# Altium PCB LEDA_Arcade Controller Mainboard (No Speaker).pcbdoc (part 1 of 2)
Units mil, origin at the board's own origin, x right, y up, seen from the top; angles counter-clockwise.
Board outline 4160.66 x 4159.61 mil, 2 copper layers (Top Layer, Bottom Layer); 47 components, 129 nets, 313 pads, 144 vias.
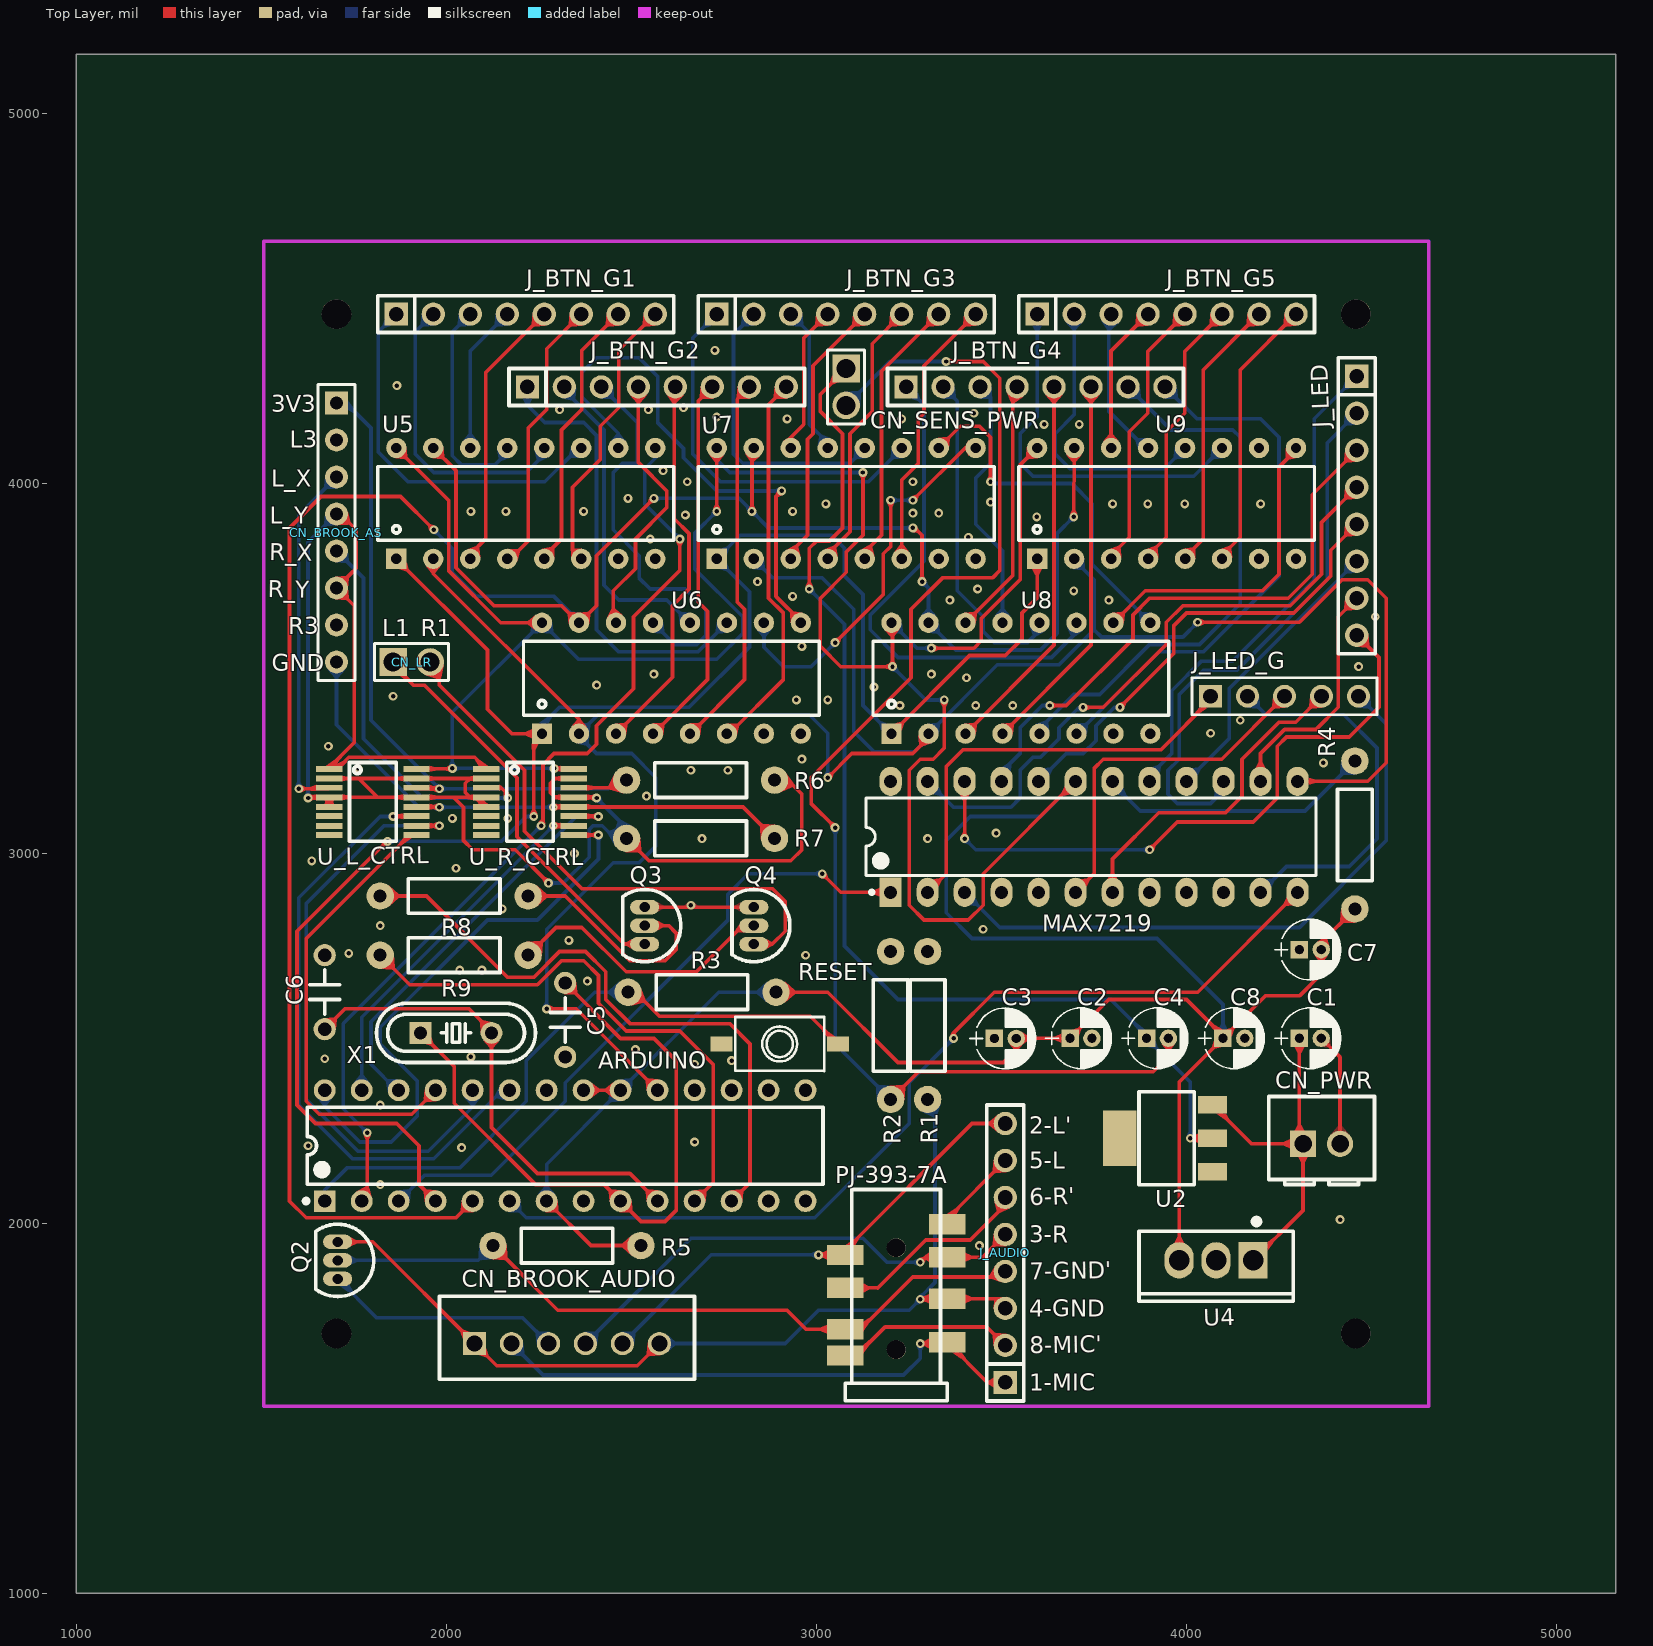
[diagram p0: Top Layer view]
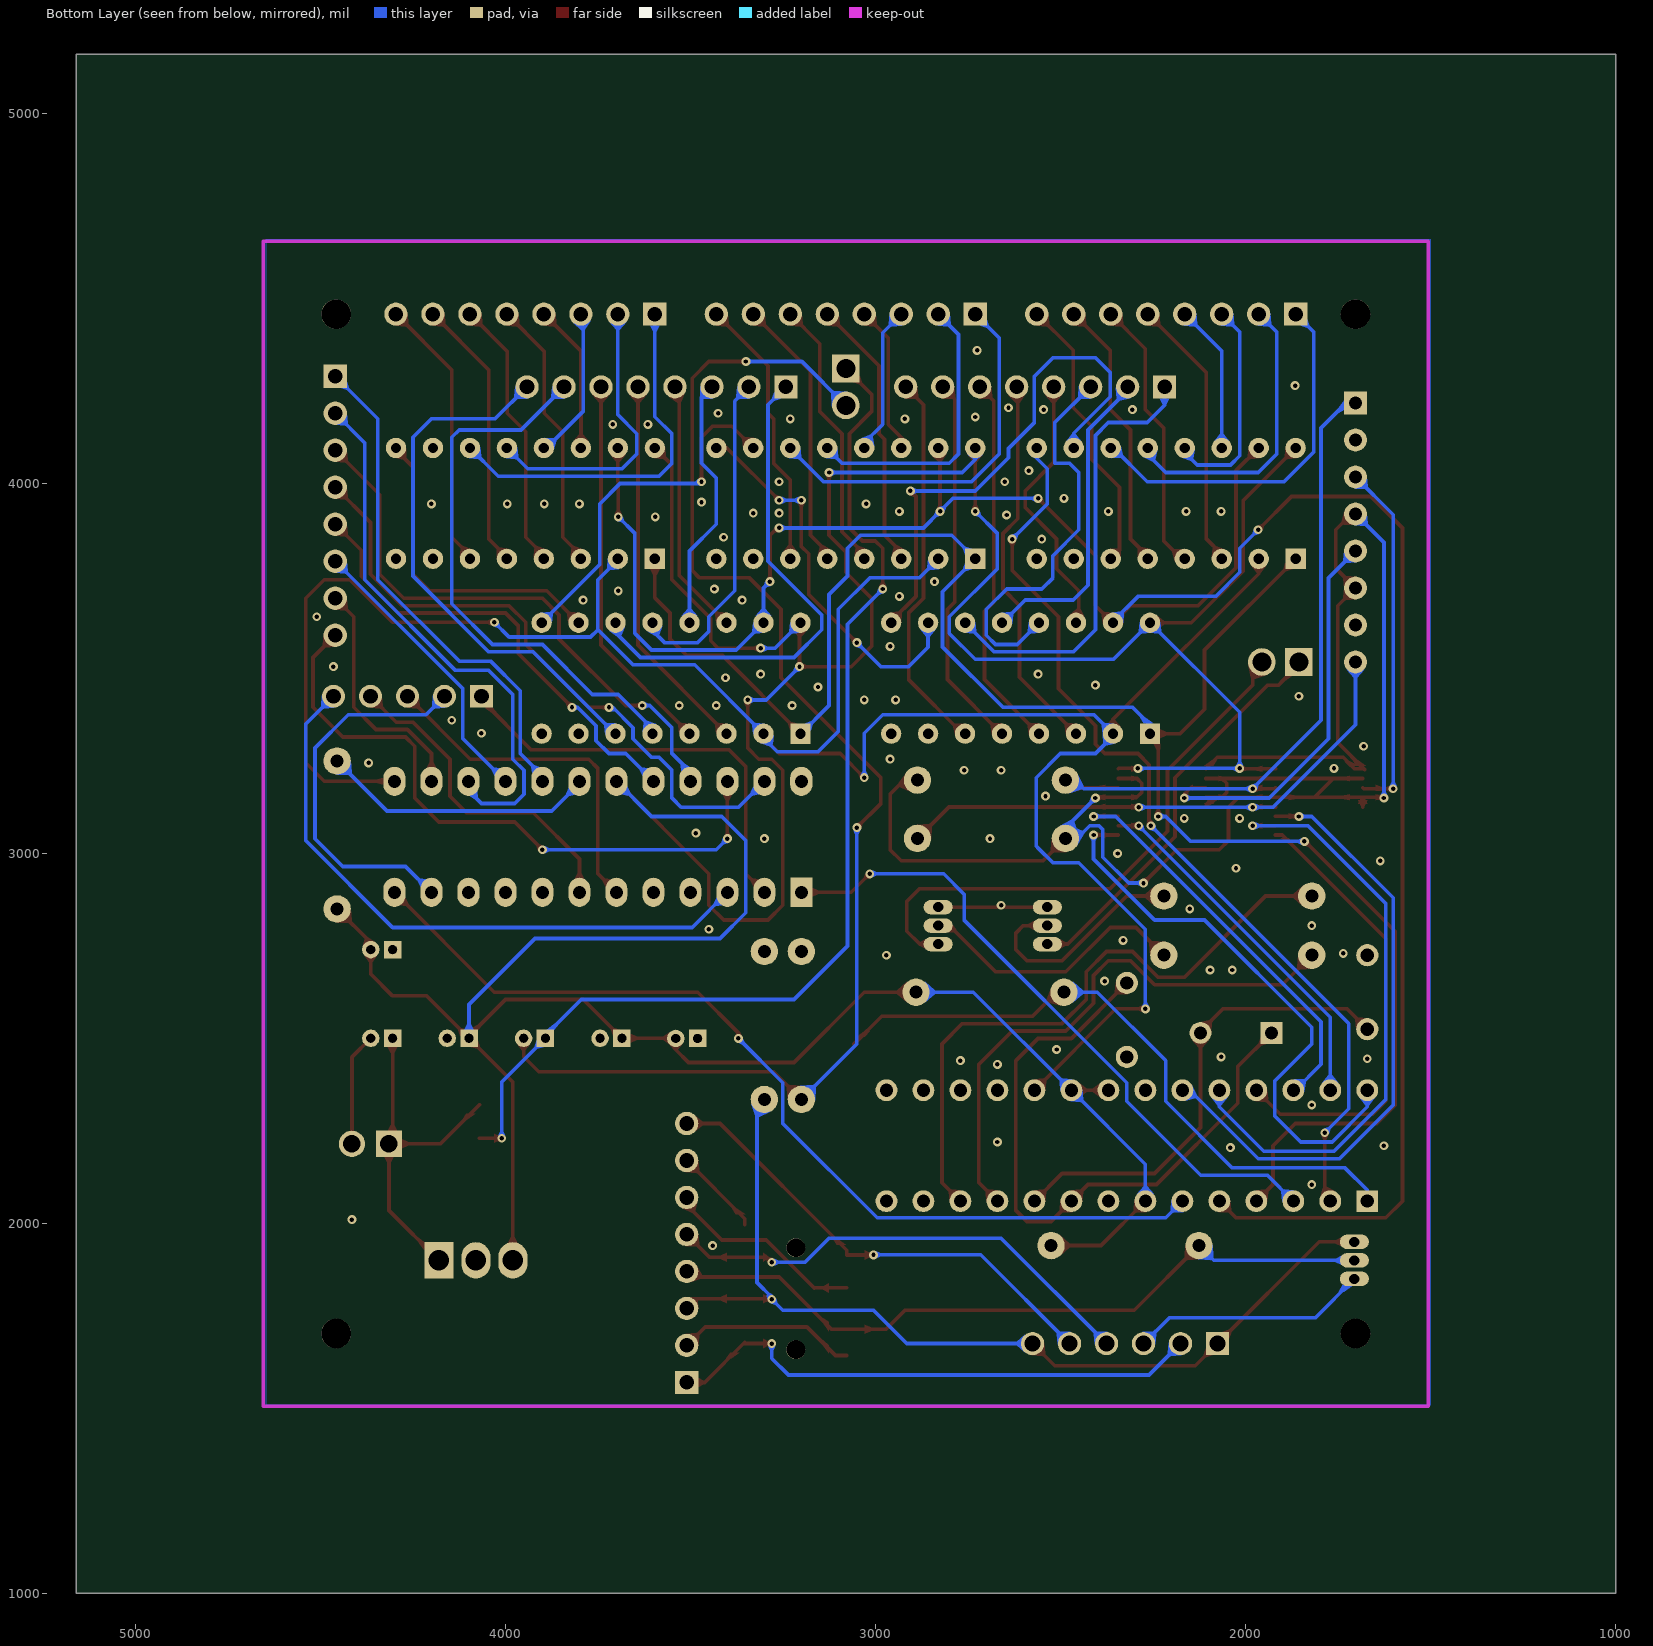
[diagram p1: Bottom Layer view, seen from below]

## Layer stack, top to bottom
Top Layer: signal copper (thickness not stored)
Dielectric: dielectric 12.6, FR-4, Dk 4.8
Bottom Layer: signal copper (thickness not stored)

## Board outline
5160.66,1000 1000,1000 1000,5159.61 5160.66,5159.61

## Components (designator, comment, footprint, x,y, rotation, side; value= is the part's Value field where it differs from the comment)
ARDUINO "ATMEGA328P-PU" DIP-28_300MIL 2321.05,2209.61 r180 top
C1 "10u" CP_RADIAL_D4.0MM_P1.50MM 4335.58,2500.01 r0 top
C2 "10u" CP_RADIAL_D4.0MM_P1.50MM 3715.58,2500.01 r0 top
C3 "0.1u" CP_RADIAL_D4.0MM_P1.50MM 3511.05,2499.61 r0 top
C4 "10u" CP_RADIAL_D4.0MM_P1.50MM 3922.28,2500.01 r0 top
C5 "22p" CAP-0.2 2321.05,2549.61 r90 top
C6 "22p" CAP-0.2 1671.05,2624.61 r270 top
C7 "0.1u" CP_RADIAL_D4.0MM_P1.50MM 4335.58,2739.61 r0 top
C8 "10u" CP_RADIAL_D4.0MM_P1.50MM 4128.88,2500.01 r0 top
CN_BROOK_AS "Header2.54mm 1*8P" HDR-8X1/2.54 1702.9,3867.2 r270 top
CN_BROOK_AUDIO "2501SB-6P" 2501SB-6P 2326.05,1674.61 r0 top
CN_LR "2.54mm 1*2P" HDR-2X1/2.54 1906.05,3517.2 r90 top
CN_PWR "2501S-2P" 2501S-2P 4366.05,2214.61 r0 top
CN_SENS_PWR "2.54mm 1*2P" HDR-2X1/2.54 3080.86,4260.9 r0 top
J_AUDIO "Header2.54mm 1*8P" HDR-TH_8PIN-V-MALE-PITCH2.54 3511.05,1919.61 r90 top
J_BTN_G1 "Header2.54mm 1*8P" HDR-TH_8PIN-V-MALE-PITCH2.54 2214.71,4457.76 r0 top
J_BTN_G2 "Header2.54mm 1*8P" HDR-TH_8PIN-V-MALE-PITCH2.54 2569.05,4260.9 r0 top
J_BTN_G3 "Header2.54mm 1*8P" HDR-TH_8PIN-V-MALE-PITCH2.54 3080.86,4457.76 r0 top
J_BTN_G4 "Header2.54mm 1*8P" HDR-TH_8PIN-V-MALE-PITCH2.54 3592.67,4260.9 r0 top
J_BTN_G5 "Header2.54mm 1*8P" HDR-TH_8PIN-V-MALE-PITCH2.54 3947,4457.76 r0 top
J_LED "Header2.54mm 1*8P" HDR-TH_8PIN-V-MALE-PITCH2.54 4461.05,3939.61 r270 top
J_LED_G "2.54mm 1*5P Header" HDR-5X1/2.54 4266.05,3424.61 r0 top
MAX7219 "max7219cng" DIP-24_300MIL 3751.05,3044.61 r180 top
PJ-393-7A "PJ-393-7A" PJ-393-7A 3216.06,1819.64 r180 top
Q2 "2N2222" TO-92(TO-92-3) 1706.05,1899.61 r0 top
Q3 "2N2222" TO-92(TO-92-3) 2536.05,2804.61 r0 top
Q4 "2N2222" TO-92(TO-92-3) 2831.05,2804.61 r0 top
R1 "0" AXIAL-0.4 3301.05,2534.61 r90 top
R2 "0" AXIAL-0.4 3201.05,2534.61 r90 top
R3 "10k" AXIAL-0.4 2691.05,2624.61 r0 top
R4 "53.6k" AXIAL-0.4 4456.05,3049.61 r90 top
R5 "100KΩ" AXIAL-0.4 2326.05,1939.61 r0 top
R6 "5.1K" AXIAL-0.4 2687.15,3197.91 r180 top
R7 "5.1K" AXIAL-0.4 2687.15,3040.41 r180 top
R8 "100KΩ" AXIAL-0.4 2021.05,2884.61 r180 top
R9 "100KΩ" AXIAL-0.4 2021.05,2724.61 r180 top
RESET "K2-1107ST-A4SW-06" K2-1107ST-A4SW-06 2901.05,2484.61 r0 top
U2 "AMS1117-5.0" SOT-223 3946.05,2229.61 r180 top
U4 "L7805CV" TO-220(TO-220-3) 4081.05,1899.61 r270 top
U5 "74HC165N" DIP16 2214.71,3945.95 r0 top
U6 "74HC165N" DIP16 2608.42,3473.5 r0 top
U7 "74HC165N" DIP16 3080.86,3945.95 r0 top
U8 "74HC165N" DIP16 3553.3,3473.5 r0 top
U9 "74HC165N" DIP16 3947,3945.95 r0 top
U_L_CTRL "74HC4051PW-Q100,11" TSSOP-16 1801.33,3138.86 r0 top
U_R_CTRL "74HC4051PW-Q100,11" TSSOP-16 2226.05,3138.86 r0 top
X1 "16MHZ" HC-49S 2026.05,2514.61 r0 top

## Footprints (in the part's own frame and the unit in brackets; to place one, negate y for a bottom-side part, rotate by r counter-clockwise, add the part's x,y. Pads: shape width x height; smd on the part's side, far side on the other; paste and mask are expansions set on the pad)
2501S-2P [mm]
  rect 1.8x1.8 hole 1.2: 1(-1.27,0)
  round 1.8 hole 1.2: 2(1.27,0)
  silkscreen extent -3.63,-2.79 3.63,3.25
2501SB-6P [mm]
  rect 1.6x1.6 hole 1.1: 1(-6.35,0)
  round 1.6 hole 1.1: 2(-3.81,0) 3(-1.27,0) 4(1.27,0) 5(3.81,0) 6(6.35,0)
  silkscreen extent -8.75,-2.45 8.75,3.25
AXIAL-0.4 [mil]
  round 74 hole 35.4: 1(-200,0) 2(200,0)
  silkscreen extent -124,-47 124,47
CAP-0.2 [mil]
  round 60 hole 36: 1(-100,0) 2(100,0)
  silkscreen extent -60,-40 60,40
CP_RADIAL_D4.0MM_P1.50MM [mm]
  rect 1.2x1.2 hole 0.6 slot 0.605 at 0 deg: 1(-0.75,0)
  round 1.2 hole 0.6 slot 0.605 at 0 deg: 2(0.75,0)
  silkscreen extent -2.45,-2.09 2.09,2.09
DIP16 [mil]
  rect 55x55 hole 28: 1(-350,-150)
  round 55 hole 28: 2(-250,-150) 3(-150,-150) 4(-50,-150) 5(50,-150) 6(150,-150) 7(250,-150) 8(350,-150) 9(350,150) 10(250,150) 11(150,150) 12(50,150) 13(-50,150) 14(-150,150) 15(-250,150) 16(-350,150)
  silkscreen extent -400,-100 400,100
DIP-24_300MIL [mm]
  rect 1.5x2 hole 0.9: 1(13.97,3.81)
  oval 1.5x2 hole 0.9: 2(11.43,3.81) 3(8.89,3.81) 4(6.35,3.81) 5(3.81,3.81) 6(1.27,3.81) 7(-1.27,3.81) 8(-3.81,3.81) 9(-6.35,3.81) 11(-11.43,3.81)
  oval 1.524x2 hole 0.9: 10(-8.89,3.81) 12(-13.97,3.81) 13(-13.97,-3.81) 14(-11.43,-3.81) 15(-8.89,-3.81) 16(-6.35,-3.81) 17(-3.81,-3.81) 18(-1.27,-3.81) 19(1.27,-3.81) 20(3.81,-3.81) 21(6.35,-3.81) 22(8.89,-3.81) 23(11.43,-3.81) 24(13.97,-3.81)
  silkscreen extent -15.24,-2.67 15.66,3.93
DIP-28_300MIL [mm]
  rect 1.5x1.5 hole 0.9: 1(16.51,3.81)
  round 1.5 hole 0.9: 2(13.97,3.81) 3(11.43,3.81) 4(8.89,3.81) 5(6.35,3.81) 6(3.81,3.81) 7(1.27,3.81) 8(-1.27,3.81) 9(-3.81,3.81) 10(-6.35,3.81) 11(-8.89,3.81) 12(-11.43,3.81) 13(-13.97,3.81) 14(-16.51,3.81) 15(-16.51,-3.81) 16(-13.97,-3.81) 17(-11.43,-3.81) 18(-8.89,-3.81) 19(-6.35,-3.81) 20(-3.81,-3.81) 21(-1.27,-3.81) 22(1.27,-3.81) 23(3.81,-3.81) 24(6.35,-3.81) 25(8.89,-3.81) 26(11.43,-3.81) 27(13.97,-3.81) 28(16.51,-3.81)
  silkscreen extent -17.7,-2.65 17.94,3.95
HC-49S [mm]
  rect 1.5x1.5 hole 0.9: 1(-2.438,0)
  round 1.5 hole 0.9: 2(2.438,0)
  silkscreen extent -5.46,-2.03 5.46,2.03
HDR-2X1/2.54 [mm]
  rect 1.9x1.9 hole 1.3: 1(0,1.27)
  round 1.9 hole 1.3: 2(0,-1.27)
  silkscreen extent -1.27,-2.54 1.27,2.54
HDR-5X1/2.54 [mil]
  rect 62x62 hole 40.16: 1(-200,0)
  round 62 hole 40.16: 2(-100,0) 3(0,0) 4(100,0) 5(200,0)
  silkscreen extent -250,-50 250,50
HDR-8X1/2.54 [mil]
  rect 62x62 hole 35: 1(-350,0)
  round 62 hole 35: 2(-250,0) 3(-150,0) 4(-50,0) 5(50,0) 6(150,0) 7(250,0) 8(350,0)
  silkscreen extent -400,-50 400,50
HDR-TH_8PIN-V-MALE-PITCH2.54 [mm]
  rect 1.6x1.6 hole 1: 1(-8.89,0)
  round 1.6 hole 1: 2(-6.35,0) 3(-3.81,0) 4(-1.27,0) 5(1.27,0) 6(3.81,0) 7(6.35,0) 8(8.89,0)
  silkscreen extent -10.16,-1.27 10.16,1.27
K2-1107ST-A4SW-06 [mm]
  rect 1.5x1 smd: 1(-4,0) 2(4,0)
  silkscreen extent -3.05,-1.85 3.05,1.85
PJ-393-7A [mm]
  rect 2.5x1.4 smd: 1(-3.5,3.6) 2(3.5,-2.4) 3(-3.5,-2.25) 4(-3.5,0.6) 5(-3.5,-4.5) 6(3.5,-0.15) 7(3.5,2.7) 8(3.5,4.5)
  round 1.3 hole 1.3 unplated: ""(0,4.099) ""(0,-2.899)
  silkscreen extent -3.5,-6.9 3.5,7.6
SOT-223 [mm]
  rect 2x1.2 smd: 1(-3.175,2.3) 2(-3.175,0) 3(-3.175,-2.3)
  rect 2.3x3.8 smd: 4(3.175,0)
  silkscreen extent -1.93,-3.2 1.87,3.2
TO-92(TO-92-3) [mm]
  oval 2x1 hole 0.7: 1(0,1.27) 2(0,0) 3(0,-1.27)
  silkscreen extent -1.5,-2.48 2.48,2.48
TO-220(TO-220-3) [mm]
  rect 2.5x2 hole 1.4: 1(0,2.54)
  oval 2.5x2 hole 1.4: 2(0,0) 3(0,-2.54)
  silkscreen extent -2.86,-5.3 2.8,5.3
TSSOP-16 [mil]
  rect 71x16 smd: 1(-118.11,89.5) 2(-118.11,63.5) 3(-118.11,38.5) 4(-118.11,12.5) 5(-118.11,-13.5) 6(-118.11,-38.5) 7(-118.11,-64.5) 8(-118.11,-89.5) 9(118.11,-89.5) 10(118.11,-64.5) 11(118.11,-38.5) 12(118.11,-13.5) 13(118.11,12.5) 14(118.11,38.5) 15(118.11,63.5) 16(118.11,89.5)
  silkscreen extent -63,-106 63,106

## Free pads (board coordinates)
  round 80 hole 80 unplated: ""(1702.9,1701.85) ""(1702.9,4457.76) ""(4458.81,1701.85) ""(4458.81,4457.76)

## Via types
v1: diameter 24, hole 12, Top Layer to Bottom Layer, 144 vias

## Nets (pads, with @x,y where several pads share a name; then routed paths per layer and width w, separated by ;. In a path a pad name is that pad's centre, name@x,y a point inside that pad or via, vN(x,y) a via of type N, cw(c..) or ccw(c..) an arc to the next point about the centre after c; other vN are vias at no path point)
AGND: CN_BROOK_AUDIO.1 CN_BROOK_AUDIO.6 J_AUDIO.3 PJ-393-7A.4 Q2.1 R1.1 | length 2594.7
  Top Layer w10: Q2.1@1706.05,1949.61 1801.04,1949.61 CN_BROOK_AUDIO.1@2076.05,1674.6 2136.04,1614.61 2511.05,1614.61 2516.06,1614.61 CN_BROOK_AUDIO.6@2576.05,1674.6 ; v1(3281.05,1794.61) 3282.47,1796.03 PJ-393-7A.4@3353.86,1796.03 3484.63,1796.03 J_AUDIO.3@3511.05,1769.61
  Bottom Layer w10: CN_BROOK_AUDIO.6@2576.05,1674.6 2916.04,1674.6 3006.05,1764.61 3251.05,1764.61 v1(3281.05,1794.61) 3281.05,1799.61 3321.05,1839.61 3321.05,2314.61 R1.1@3301.05,2334.61
AJ_DETECT: CN_BROOK_AUDIO.3 Q2.3 | length 642.5
  Bottom Layer w10: Q2.3@1706.05,1849.61 1811.05,1744.61 2066.05,1744.61 2206.05,1744.61 CN_BROOK_AUDIO.3@2276.05,1674.61
AJ_L: CN_BROOK_AUDIO.5 J_AUDIO.8 PJ-393-7A.2 | length 1289.3
  Top Layer w10: v1(3006.05,1914.61) 3006.52,1914.14 PJ-393-7A.2@3078.26,1914.14 3078.26,1926.82 3421.05,2269.61 J_AUDIO.8@3511.05,2269.61
  Bottom Layer w10: CN_BROOK_AUDIO.5@2476.05,1674.6 2716.06,1914.61 v1(3006.05,1914.61)
AJ_L': J_AUDIO.7 PJ-393-7A.5 | length 237.9
  Top Layer w10: PJ-393-7A.5@3353.86,1996.81 3353.85,2012.41 J_AUDIO.7@3511.05,2169.61
AJ_MIC: CN_BROOK_AUDIO.2 J_AUDIO.1 PJ-393-7A.1 | length 1477
  Top Layer w10: v1(3281.05,1674.61) 3353.85,1674.61 PJ-393-7A.1@3353.86,1677.92 3462.16,1569.61 J_AUDIO.1@3511.05,1569.61
  Bottom Layer w10: CN_BROOK_AUDIO.2@2176.05,1674.61 2261.05,1589.61 3236.05,1589.61 3281.05,1634.61 v1(3281.05,1674.61)
AJ_MIC': J_AUDIO.2 PJ-393-7A.8 | length 485.4
  Top Layer w10: PJ-393-7A.8@3078.26,1642.48 3108.92,1642.48 3186.05,1719.61 3461.05,1719.61 J_AUDIO.2@3511.05,1669.61
AJ_R: CN_BROOK_AUDIO.4 J_AUDIO.5 PJ-393-7A.3 | length 1311
  Top Layer w10: v1(3281.05,1894.61) 3294.67,1908.23 PJ-393-7A.3@3353.86,1908.23 3449.67,1908.23 J_AUDIO.5@3511.05,1969.61
  Bottom Layer w10: CN_BROOK_AUDIO.4@2376.05,1674.6 2661.05,1959.61 3126.05,1959.61 3191.05,1894.61 v1(3281.05,1894.61)
AJ_R': J_AUDIO.6 PJ-393-7A.6 | length 546
  Top Layer w10: PJ-393-7A.6@3078.26,1825.55 3166.15,1824.71 3296.05,1954.61 3416.05,1954.61 3511.05,2049.61 J_AUDIO.6@3511.05,2069.61
ARDUINO_1: ARDUINO.1 R3.1 RESET.2 | length 1761.5
  Top Layer w10: R3.1@2491.05,2624.61 2511.05,2624.61 2576.05,2559.61 2983.53,2559.61 RESET.2@3058.53,2484.61
  Bottom Layer w10: ARDUINO.1@1671.05,2059.61 1671.05,2089.61 1731.05,2149.61 2036.05,2149.61 2216.05,2329.61 2216.05,2439.61 2401.05,2624.61 R3.1@2491.05,2624.61
ARDUINO_9: ARDUINO.9 C5.2 X1.1 | length 1764.7
  Top Layer w10: X1.1@1930.05,2514.61 2021.05,2423.61 2021.05,2384.61 2021.05,2324.61 2241.05,2104.61 2426.05,2104.61 ARDUINO.9@2471.05,2059.61 2526.05,2004.61 2591.05,2004.61 2621.05,2034.61 2621.05,2439.61 2561.05,2499.61 2471.05,2499.61 C5.2@2321.05,2649.61
ARDUINO_10: ARDUINO.10 C6.2 X1.2 | length 1290.5
  Top Layer w10: C6.2@1671.05,2524.61 1726.05,2579.61 2061.05,2579.61 2122.05,2518.61 X1.2@2122.05,2514.61 2122.05,2258.61 2246.05,2134.61 2496.05,2134.61 ARDUINO.10@2571.05,2059.61
ARDUINO_13: ARDUINO.13
ARDUINO_14: ARDUINO.14
ARDUINO_15: ARDUINO.15
ARDUINO_16: ARDUINO.16
ARDUINO_17: ARDUINO.17
ARDUINO_18: ARDUINO.18
AS_GND: CN_BROOK_AS.8 R7.1 U_L_CTRL.12 U_R_CTRL.12 | length 1543.5
  Top Layer w10: U_L_CTRL.12@1919.44,3125.36 1980.3,3125.36 v1(1981.05,3124.61) ; v1(2289.04,3124.61) 2289.8,3125.36 U_R_CTRL.12@2344.16,3125.36 2802.2,3125.36 R7.1@2887.15,3040.41
  Bottom Layer w10: CN_BROOK_AS.8@1702.95,3517.21 1702.95,3347.71 1926.05,3124.61 v1(1981.05,3124.61) v1(2289.04,3124.61)
AS_HALF_VCC: CN_BROOK_AS.4 CN_BROOK_AS.6 R6.1 R7.2 U_L_CTRL.1 U_L_CTRL.2 U_L_CTRL.4 U_L_CTRL.5 U_L_CTRL.13 U_L_CTRL.15 U_R_CTRL.1 U_R_CTRL.2 U_R_CTRL.4 U_R_CTRL.5 U_R_CTRL.13 U_R_CTRL.15 | length 5243.4
  Top Layer w10: v1(1626.05,3149.61) 1627.8,3151.36 U_L_CTRL.4@1683.22,3151.36 ; U_L_CTRL.1@1678.25,3226.81 1751.05,3299.61 1751.05,3669.11 CN_BROOK_AS.6@1702.95,3717.21 ; U_L_CTRL.5@1683.22,3125.36 U_L_CTRL.4@1683.22,3151.36 ; U_L_CTRL.1@1683.25,3228.31 1704.85,3228.31 1736.05,3259.61 2076.65,3259.61 U_R_CTRL.1@2107.95,3228.31 ; CN_BROOK_AS.6@1702.9,3717.21 1741.05,3755.36 1756.05,3770.36 1756.05,3874.61 1713.45,3917.21 CN_BROOK_AS.4@1702.9,3917.21 ; 1813.77,3151.36 1762.77,3202.36 U_L_CTRL.2@1683.22,3202.36 U_L_CTRL.15@1919.44,3202.36 U_R_CTRL.2@2107.94,3202.36 ; U_R_CTRL.5@2107.94,3125.36 2081.94,3151.36 U_L_CTRL.13@1919.44,3151.36 ; U_R_CTRL.4@2107.95,3151.41 2064.25,3151.41 2051.05,3164.61 2051.05,3189.61 2063.75,3202.31 U_R_CTRL.2@2107.95,3202.31 ; v1(2276.05,2919.61) 2186.05,3009.61 2071.05,3009.61 2046.05,3034.61 2046.05,3124.61 2019.3,3151.36 U_L_CTRL.13@1919.44,3151.36 ; U_R_CTRL.13@2344.16,3151.36 2404.3,3151.36 v1(2406.05,3149.61) ; U_R_CTRL.13@2344.16,3151.36 2294.25,3151.41 2281.05,3164.61 2281.05,3189.61 2293.75,3202.31 U_R_CTRL.15@2344.15,3202.31 ; R7.2@2487.15,3040.41 2547.95,2979.61 2931.05,2979.61 2961.05,3009.61 2961.05,3159.61 2922.75,3197.91 R6.1@2887.15,3197.91 ; U_L_CTRL.4@1683.22,3151.36 U_L_CTRL.13@1919.44,3151.36
  Bottom Layer w10: v1(1626.05,3149.61) 1626.05,3840.31 CN_BROOK_AS.4@1702.95,3917.21 ; v1(2276.05,2919.61) 2316.05,2919.61 2386.05,2989.61 2386.05,3064.61 2396.05,3074.61 2421.05,3074.61 2455.25,3040.41 R7.2@2487.15,3040.41 2487.15,3068.51 v1(2406.05,3149.61)
AS_VCC: CN_BROOK_AS.1 R6.2 U_L_CTRL.14 U_R_CTRL.14 | length 1902.7
  Top Layer w10: U_L_CTRL.14@1919.44,3177.36 1922.19,3174.61 v1(1981.05,3174.61) ; U_R_CTRL.14@2344.16,3177.36 2466.6,3177.36 R6.2@2487.15,3197.91
  Bottom Layer w10: CN_BROOK_AS.1@1702.95,4217.21 1728.45,4217.21 1796.05,4149.61 1796.05,3359.61 v1(1981.05,3174.61) 2437.69,3174.61 2460.99,3197.91 R6.2@2487.15,3197.91
BTN_1: J_BTN_G1.1 U5.11 | length 1013
  Bottom Layer w10: J_BTN_G1.1@1864.75,4457.71 1816.05,4409.11 1816.05,4084.61 1896.05,4004.61 2266.05,4004.61 2357.35,4095.91 U5.11@2364.75,4095.91
BTN_2: J_BTN_G1.2 U5.12 | length 805.5
  Bottom Layer w10: J_BTN_G1.2@1964.75,4457.71 1916.05,4409.11 1916.05,4079.61 1966.05,4029.61 2216.05,4029.61 2264.75,4078.31 U5.12@2264.75,4095.91
BTN_3: J_BTN_G1.3 U5.13 | length 588.9
  Bottom Layer w10: J_BTN_G1.3@2064.75,4457.71 2016.05,4409.11 2016.05,4074.61 2041.05,4049.61 2131.05,4049.61 2164.75,4083.31 U5.13@2164.75,4095.91
BTN_4: J_BTN_G1.4 U5.14 | length 403.2
  Bottom Layer w10: U5.14@2064.71,4095.95 2064.71,4357.76 J_BTN_G1.4@2164.71,4457.76
BTN_5: J_BTN_G1.5 U5.3 | length 744.7
  Top Layer w10: U5.3@2064.71,3795.95 2064.71,3808.27 2106.05,3849.61 2106.05,4299.1 J_BTN_G1.5@2264.71,4457.76
BTN_6: J_BTN_G1.6 U5.4 | length 749.1
  Top Layer w10: U5.4@2164.75,3795.91 2172.35,3795.91 2221.05,3844.61 2221.05,4149.61 2271.05,4199.61 2271.05,4364.11 J_BTN_G1.6@2364.75,4457.71
BTN_7: J_BTN_G1.7 U5.5 | length 744.7
  Top Layer w10: U5.5@2264.71,3795.95 2264.71,3803.27 2311.05,3849.61 2311.05,4144.61 2366.05,4199.61 2366.05,4359.1 J_BTN_G1.7@2464.71,4457.76
BTN_8: J_BTN_G1.8 U5.6 | length 764.5
  Top Layer w10: U5.6@2364.75,3795.91 2341.05,3819.61 2341.05,3989.61 2416.05,4064.61 2416.05,4154.61 2466.05,4204.61 2466.05,4359.81 J_BTN_G1.8@2564.75,4457.71
BTN_9: J_BTN_G2.1 U6.11 | length 1205.2
  Bottom Layer w10: J_BTN_G2.1@2219.05,4260.91 2219.05,4211.61 2266.05,4164.61 2371.05,4164.61 2406.05,4129.61 2406.05,3604.61 2466.05,3544.61 2679.55,3544.61 U6.11@2758.45,3623.51
BTN_10: J_BTN_G2.2 U6.12 | length 868.1
  Bottom Layer w10: J_BTN_G2.2@2319.05,4260.91 2309.75,4260.91 2426.05,4144.61 2426.05,3724.61 2466.05,3684.61 2596.05,3684.61 2657.15,3623.51 U6.12@2658.45,3623.51
BTN_11: J_BTN_G2.3 U6.13 | length 1098.6
  Bottom Layer w10: J_BTN_G2.3@2419.05,4260.91 2516.05,4164.61 2516.05,4054.61 2476.05,4054.61 2451.05,4029.61 2451.05,3874.61 2521.05,3804.61 2521.05,3744.61 2551.05,3714.61 2646.05,3714.61 2701.05,3659.61 2701.05,3589.61 2676.05,3564.61 2617.35,3564.61 U6.13@2558.45,3623.51
BTN_12: J_BTN_G2.4 U6.14 | length 736.8
  Top Layer w10: U6.14@2458.45,3623.51 2451.05,3623.51 2451.05,3709.61 2511.05,3769.61 2511.05,3849.61 2596.05,3934.61 2596.05,3979.61 2519.05,4056.61 J_BTN_G2.4@2519.05,4260.91
BTN_13: J_BTN_G2.5 U6.3 | length 1037.1
  Top Layer w10: U6.3@2458.45,3323.51 2611.05,3476.11 2611.05,3669.61 2656.05,3714.61 2656.05,3864.61 2616.05,3904.61 2616.05,4257.91 J_BTN_G2.5@2619.05,4260.91
BTN_14: J_BTN_G2.6 U6.4 | length 1025.5
  Top Layer w10: U6.4@2558.41,3323.51 2559.95,3323.51 2706.05,3469.61 2706.05,3654.61 2681.05,3679.61 2681.05,4222.92 J_BTN_G2.6@2719.04,4260.91
BTN_15: J_BTN_G2.7 U6.5 | length 1021.4
  Top Layer w10: U6.5@2658.41,3323.51 2659.95,3323.51 2806.05,3469.61 2806.05,3659.61 2786.05,3679.61 2786.05,4227.92 J_BTN_G2.7@2819.04,4260.91
BTN_16: J_BTN_G2.8 U6.6 | length 1040.9
  Top Layer w10: U6.6@2758.45,3323.51 2764.95,3323.51 2911.05,3469.61 2911.05,3649.61 2871.05,3689.61 2871.05,4212.91 J_BTN_G2.8@2919.05,4260.91
BTN_17: J_BTN_G3.1 U7.11 | length 1039.5
  Bottom Layer w10: J_BTN_G3.1@2730.85,4457.71 2666.05,4392.91 2666.05,4079.61 2741.05,4004.61 3141.05,4004.61 3230.85,4094.41 U7.11@3230.85,4095.95
BTN_18: J_BTN_G3.2 U7.12 | length 783.9
  Bottom Layer w10: J_BTN_G3.2@2830.85,4457.71 2776.05,4402.91 2776.05,4079.61 2801.05,4054.61 3091.05,4054.61 3130.85,4094.41 U7.12@3130.85,4095.95
BTN_19: J_BTN_G3.3 U7.13 | length 403.2
  Bottom Layer w10: J_BTN_G3.3@2930.85,4457.76 2981.05,4407.56 2981.05,4159.61 3030.85,4109.81 U7.13@3030.85,4095.95
BTN_20: J_BTN_G3.4 U7.14 | length 403.2
  Top Layer w10: U7.14@2930.85,4095.95 2930.85,4124.41 2966.05,4159.61 2966.05,4392.96 J_BTN_G3.4@3030.85,4457.76
BTN_21: J_BTN_G3.5 U7.3 | length 744.6
  Top Layer w10: U7.3@2930.85,3795.95 2930.85,3814.41 2976.05,3859.61 2976.05,4119.61 2991.05,4134.61 2991.05,4317.91 J_BTN_G3.5@3130.85,4457.71
BTN_22: J_BTN_G3.6 U7.4 | length 744.6
  Top Layer w10: U7.4@3030.85,3795.95 3030.85,3809.41 3091.05,3869.61 3091.05,4134.61 3151.05,4194.61 3151.05,4377.91 J_BTN_G3.6@3230.85,4457.71
BTN_23: J_BTN_G3.7 U7.5 | length 744.7
  Top Layer w10: U7.5@3130.85,3795.95 3130.85,3814.41 3176.05,3859.61 3176.05,4302.96 J_BTN_G3.7@3330.85,4457.76
BTN_24: J_BTN_G3.8 U7.6 | length 744.6
  Top Layer w10: U7.6@3230.85,3795.95 3230.85,4009.41 3276.05,4054.61 3276.05,4174.61 3291.05,4189.61 3291.05,4317.91 J_BTN_G3.8@3430.85,4457.71
BTN_25: J_BTN_G4.1 U8.11 | length 1379.2
  Bottom Layer w10: J_BTN_G4.1@3242.66,4260.91 3291.05,4212.51 3291.05,3789.61 3146.05,3644.61 3146.05,3604.61 3221.05,3529.61 3636.05,3529.61 3703.25,3596.81 U8.11@3703.29,3623.51
BTN_26: J_BTN_G4.2 U8.12 | length 905.9
  Bottom Layer w10: J_BTN_G4.2@3342.66,4260.91 3381.05,4222.51 3381.05,3709.61 3451.05,3639.61 3451.05,3599.61 3481.05,3569.61 3571.05,3569.61 3603.25,3601.81 U8.12@3603.29,3623.51
BTN_27: J_BTN_G4.3 U8.13 | length 695.7
  Bottom Layer w10: J_BTN_G4.3@3442.66,4260.91 3471.05,4232.52 3471.05,4054.61 3431.05,4014.61 3431.05,3889.61 3503.29,3817.37 U8.13@3503.29,3623.51
BTN_28: J_BTN_G4.4 U8.14 | length 701.9
  Top Layer w10: U8.14@3403.29,3623.51 3531.05,3751.31 3531.05,4260.91 J_BTN_G4.4@3542.66,4260.91
BTN_29: J_BTN_G4.5 U8.3 | length 1036.6
  Top Layer w10: U8.3@3403.29,3323.51 3642.66,3562.88 J_BTN_G4.5@3642.66,4260.91
BTN_30: J_BTN_G4.6 U8.4 | length 1036.6
  Top Layer w10: U8.4@3503.29,3323.51 3742.66,3562.88 J_BTN_G4.6@3742.66,4260.91
BTN_31: J_BTN_G4.7 U8.5 | length 1505.9
  Bottom Layer w10: U8.5@3603.29,3323.51 3603.25,3336.81 3696.05,3429.61 3766.05,3429.61 3901.05,3564.61 4036.05,3564.61 4146.05,3674.61 4146.05,4124.61 4126.05,4144.61 3958.95,4144.61 J_BTN_G4.7@3842.66,4260.91
BTN_32: J_BTN_G4.8 U8.6 | length 1464.2
  Bottom Layer w10: U8.6@3703.29,3323.51 3704.95,3323.51 3926.05,3544.61 4046.05,3544.61 4251.05,3749.61 4251.05,4124.61 4201.05,4174.61 4028.95,4174.61 J_BTN_G4.8@3942.66,4260.91
BTN_33: J_BTN_G5.1 U9.11 | length 1014.3
  Bottom Layer w10: J_BTN_G5.1@3597.05,4457.71 3597.05,4180.51 3551.05,4134.61 3551.05,4054.61 3586.05,4019.61 4020.65,4019.61 U9.11@4097.05,4095.91
BTN_34: J_BTN_G5.2 U9.12 | length 790.1
  Bottom Layer w10: J_BTN_G5.2@3697,4457.76 3697,4185.56 3646.05,4134.61 3646.05,4079.61 3686.05,4039.61 3940.66,4039.61 U9.12@3997,4095.95
BTN_35: J_BTN_G5.3 U9.13 | length 412.4
  Bottom Layer w10: J_BTN_G5.3@3797,4457.76 3791.05,4451.81 3791.05,4194.61 3889.71,4095.95 U9.13@3897,4095.95
BTN_36: J_BTN_G5.4 U9.14 | length 403.2
  Top Layer w10: U9.14@3797,4095.95 3797,4357.76 J_BTN_G5.4@3897,4457.76
BTN_37: J_BTN_G5.5 U9.3 | length 744.7
  Top Layer w10: U9.3@3797,3795.95 3797,3805.56 3846.05,3854.61 3846.05,4139.61 3896.05,4189.61 3896.05,4356.81 J_BTN_G5.5@3997,4457.76
BTN_38: J_BTN_G5.6 U9.4 | length 744.6
  Top Layer w10: U9.4@3897.05,3795.91 3897.05,3805.51 3946.05,3854.61 3946.05,4139.61 3996.05,4189.61 3996.05,4356.81 J_BTN_G5.6@4097.05,4457.71
BTN_39: J_BTN_G5.7 U9.5 | length 744.7
  Top Layer w10: U9.5@3997,3795.95 3997,3800.56 4046.05,3849.61 4046.05,4306.81 J_BTN_G5.7@4197,4457.76
BTN_40: J_BTN_G5.8 U9.6 | length 744.7
  Top Layer w10: U9.6@4097,3795.95 4097,3805.56 4146.05,3854.61 4146.05,4306.81 J_BTN_G5.8@4297,4457.76
EXT_AJ_GND': J_AUDIO.4 PJ-393-7A.7 Q2.2 R5.1 | length 1980
  Top Layer w10: R5.1@2126.05,1939.61 2301.05,1764.61 2921.05,1764.61 2972.31,1713.35 PJ-393-7A.7@3078.26,1713.35 ; PJ-393-7A.7@3078.26,1713.35 3119.75,1713.31 3261.05,1854.61 3496.05,1854.61 J_AUDIO.4@3511.05,1869.61
  Bottom Layer w10: Q2.2@1706.05,1899.61 2086.05,1899.61 R5.1@2126.05,1939.61
GND_SENS: C4.2 CN_SENS_PWR.2 R2.1 | length 3655.7
  Top Layer w10: v1(3051.05,3069.61) 2986.05,3134.61 2986.05,3204.61 3256.05,3474.61 3256.05,3659.61 3341.05,3744.61 3476.05,3744.61 3496.05,3764.61 3496.05,4284.61 3451.05,4329.61 v1(3351.05,4329.61) ; R2.1@3201.05,2334.61 3276.05,2409.61 3911.05,2409.61 3951.81,2450.37 C4.2@3951.81,2500.01
  Bottom Layer w10: v1(3051.05,3069.61) 3051.05,2484.61 R2.1@3201.05,2334.61 ; CN_SENS_PWR.2@3080.85,4210.91 3199.55,4329.61 v1@3346.05,4329.61
L1: CN_LR.2 Q4.3 | length 1526.4
  Top Layer w10: CN_LR.2@1956.05,3517.21 1981.05,3492.21 1981.05,3454.61 2211.05,3224.61 2211.05,3059.61 2366.05,2904.61 2881.05,2904.61 2916.05,2869.61 2916.05,2789.61 2881.05,2754.61 Q4.3@2831.05,2754.61
L_3: CN_BROOK_AS.2
L_X: CN_BROOK_AS.3 U_L_CTRL.3 | length 968.1
  Top Layer w10: v1(1601.05,3174.61) 1680.47,3174.61 U_L_CTRL.3@1683.22,3177.36
  Bottom Layer w10: v1(1601.05,3174.61) 1601.05,3915.36 CN_BROOK_AS.3@1702.9,4017.21
L_X_CTRL_0: ARDUINO.23 U_L_CTRL.11 | length 1676.5
  Top Layer w10: v1(1856.05,3099.61) 1856.8,3100.36 U_L_CTRL.11@1919.44,3100.36
  Bottom Layer w10: v1(1856.05,3099.61) 1821.05,3099.61 1601.05,2879.61 1601.05,2319.61 1746.05,2174.61 1966.05,2174.61 2151.05,2359.61 ARDUINO.23@2171.05,2359.61
L_X_CTRL_1: ARDUINO.24 U_L_CTRL.10 | length 1641.4
  Top Layer w10: U_L_CTRL.10@1919.44,3074.36 1980.8,3074.36 v1(1981.05,3074.61)
  Bottom Layer w10: v1(1981.05,3074.61) 1831.05,3074.61 1621.05,2864.61 1621.05,2334.61 1761.05,2194.61 1951.05,2194.61 2071.05,2314.61 ARDUINO.24@2071.05,2359.61
L_X_CTRL_2: ARDUINO.25 U_L_CTRL.9 | length 1245.7
  Top Layer w10: U_L_CTRL.9@1919.45,3049.41 1900.85,3049.41 1621.05,2769.61 1621.05,2329.61 1656.05,2294.61 1906.05,2294.61 ARDUINO.25@1971.05,2359.61
LED_1: J_LED.1 MAX7219.17 | length 1376.8
  Bottom Layer w10: MAX7219.17@3901.05,3194.61 3901.05,3209.61 3961.05,3269.61 3961.05,3439.61 4041.05,3519.61 4126.05,3519.61 4346.05,3739.61 4346.05,4174.61 J_LED.1@4461.05,4289.61
LED_2: J_LED.2 MAX7219.15 | length 1493.8
  Bottom Layer w10: MAX7219.15@4101.05,3194.61 4101.05,3169.61 4066.05,3134.61 3976.05,3134.61 3951.05,3159.61 3951.05,3224.61 3981.05,3254.61 3981.05,3429.61 4046.05,3494.61 4136.05,3494.61 4381.05,3739.61 4381.05,4109.61 J_LED.2@4461.05,4189.61
LED_3: J_LED.3 MAX7219.21 | length 1550.4
  Top Layer w10: v1(3631.05,3399.61) 3676.05,3399.61 3856.05,3579.61 3856.05,3644.61 3901.05,3689.61 4276.05,3689.61 4341.05,3754.61 4341.05,3969.61 J_LED.3@4461.05,4089.61
  Bottom Layer w10: MAX7219.21@3501.05,3194.61 3501.05,3219.61 3551.05,3269.61 3551.05,3339.61 3611.05,3399.61 v1(3631.05,3399.61)
LED_4: J_LED.4 MAX7219.23 | length 1726
  Top Layer w10: v1(3721.05,3394.61) 3776.05,3394.61 3946.05,3564.61 3946.05,3624.61 3991.05,3669.61 4281.05,3669.61 4366.05,3754.61 4366.05,3894.61 J_LED.4@4461.05,3989.61
  Bottom Layer w10: MAX7219.23@3301.05,3194.61 3371.05,3124.61 3526.05,3124.61 3551.05,3149.61 3551.05,3224.61 3586.05,3259.61 3606.05,3259.61 3656.05,3309.61 3656.05,3339.61 3711.05,3394.61 v1(3721.05,3394.61)
LED_5: J_LED.5 MAX7219.20 | length 1256.2
  Top Layer w10: v1(3821.05,3394.61) 3966.05,3539.61 3966.05,3614.61 4001.05,3649.61 4291.05,3649.61 4391.05,3749.61 4391.05,3819.61 J_LED.5@4461.05,3889.61
  Bottom Layer w10: MAX7219.20@3601.05,3194.61 3676.05,3269.61 3721.05,3269.61 3756.05,3304.61 3756.05,3344.61 3806.05,3394.61 v1(3821.05,3394.61)
LED_6: J_LED.6 MAX7219.16 | length 785.5
  Bottom Layer w10: MAX7219.16@4001.05,3194.61 4116.05,3309.61 4116.05,3444.61 J_LED.6@4461.05,3789.61
LED_7: J_LED.7 MAX7219.14 | length 652.5
  Top Layer w10: MAX7219.14@4201.05,3194.61 4201.05,3269.61 4266.05,3334.61 4351.05,3334.61 4411.05,3394.61 4411.05,3639.61 J_LED.7@4461.05,3689.61
LED_8: J_LED.8 MAX7219.22 | length 1748.8
  Top Layer w10: v1(3401.05,3039.61) MAX7219.22@3401.05,3194.61 ; v1(3901.05,3009.61) 3976.05,3084.61 4181.05,3084.61 4246.05,3149.61 4246.05,3289.61 4271.05,3314.61 4441.05,3314.61 4521.05,3394.61 4521.05,3529.61 J_LED.8@4461.05,3589.61
  Bottom Layer w10: v1(3401.05,3039.61) 3431.05,3009.61 v1(3901.05,3009.61)
LED_G1: J_LED_G.1 MAX7219.2 | length 1160.3
  Top Layer w10: MAX7219.2@3301.05,2894.61 3351.05,2944.61 3351.05,3234.61 3396.05,3279.61 3931.05,3279.61 4066.05,3414.61 J_LED_G.1@4066.05,3424.61
LED_G2: J_LED_G.2 MAX7219.11 | length 1028.1
  Bottom Layer w10: J_LED_G.2@4166.05,3424.61 4216.05,3374.61 4426.05,3374.61 4516.05,3284.61 4516.05,3039.61 4441.05,2964.61 4271.05,2964.61 MAX7219.11@4201.05,2894.61
LED_G3: J_LED_G.3 MAX7219.6 | length 951.5
  Top Layer w10: MAX7219.6@3701.05,2894.61 3751.05,2944.61 3751.05,3229.61 3776.05,3254.61 4096.05,3254.61 J_LED_G.3@4266.05,3424.61
LED_G4: J_LED_G.4 MAX7219.7 | length 895.8
  Top Layer w10: MAX7219.7@3801.05,2894.61 3801.05,2984.61 3926.05,3109.61 4106.05,3109.61 4151.05,3154.61 4151.05,3254.61 4251.05,3354.61 4296.05,3354.61 J_LED_G.4@4366.05,3424.61
LED_G5: J_LED_G.5 MAX7219.3 | length 1697.8
  Bottom Layer w10: MAX7219.3@3401.05,2894.61 3496.05,2799.61 4306.05,2799.61 4541.05,3034.61 4541.05,3349.61 J_LED_G.5@4466.05,3424.61
MAX7219_5: MAX7219.5
MAX7219_8: MAX7219.8
MAX7219_10: MAX7219.10
MAX7219_18: MAX7219.18 R4.2 | length 747
  Bottom Layer w10: MAX7219.18@3801.05,3194.61 3801.05,3189.61 3876.05,3114.61 4321.05,3114.61 R4.2@4456.05,3249.61
MAX7219_24: MAX7219.24
PGND: ARDUINO.8 ARDUINO.22 C1.2 C2.2 C3.1 C5.1 C6.1 C7.1 C8.2 CN_PWR.2 MAX7219.4 MAX7219.9 Q3.1 Q4.1 R1.2 R2.2 RESET.1 U2.1 U4.2 U5.8 U6.8 U7.8 U8.8 U9.8 U_L_CTRL.6 U_L_CTRL.7 U_L_CTRL.8 U_R_CTRL.6 U_R_CTRL.7 U_R_CTRL.8 | length 601.5
  Top Layer w10: Q3.1@2536.05,2854.61 Q4.1@2831.05,2854.61 ; C1.2@4365.11,2500.01 4416.05,2449.07 CN_PWR.2@4416.05,2214.61
  other v1: 3441.05,1939.61 4416.05,2009.61 1821.05,2104.61 2041.05,2204.61 1626.05,2209.61 2671.05,2219.61 1821.05,2319.61 2671.05,2429.61 2771.05,2439.61 1671.05,2444.61 2066.05,2449.61 2511.05,2469.61 2381.05,2654.61 2036.05,2684.61 2096.05,2684.61 2971.05,2724.61 1736.05,2729.61 2331.05,2764.61 3451.05,2794.61 1821.05,2804.61 2151.05,2849.61 2661.05,2859.61 2026.05,2959.61 1636.05,2979.61 2346.05,2999.61 2691.05,3039.61 3301.05,3039.61 3486.05,3054.61 2016.05,3094.61 2166.05,3094.61 2541.05,3154.61 2661.05,3224.61 2761.05,3224.61 1761.05,3229.61 4371.05,3244.61 2961.05,3254.61 1681.05,3289.61 4066.05,3324.61 4146.05,3359.61 3226.05,3399.61 3431.05,3399.61 3531.05,3399.61 2946.05,3414.61 3031.05,3414.61 1856.05,3424.61 3156.05,3449.61 2406.05,3454.61 3406.05,3474.61 2561.05,3484.61 3311.05,3484.61 4466.05,3504.61 2961.05,3559.61 4511.05,3639.61 3361.05,3684.61 3791.05,3684.61 2936.05,3694.61 3696.05,3709.61 3436.05,3714.61 2841.05,3734.61 2551.05,3849.61 3411.05,3854.61 3596.05,3909.61 2646.05,3914.61 3261.05,3919.61 3331.05,3919.61 2066.05,3924.61 2161.05,3924.61 2371.05,3924.61 2936.05,3924.61 3026.05,3944.61 3801.05,3944.61 3896.05,3944.61 3996.05,3944.61 4201.05,3944.61 3471.05,3949.61 2491.05,3959.61 2651.05,4004.61 3261.05,4004.61 2586.05,4034.61 3616.05,4159.61 3711.05,4159.61 2921.05,4174.61 3231.05,4174.61 2731.05,4179.61 3426.05,4189.61 2306.05,4199.61 2546.05,4199.61 2641.05,4204.61 1866.05,4264.61 2726.05,4359.61
PIN_L1: ARDUINO.11 R9.2 | length 1510.7
  Top Layer w10: R9.2@1821.05,2724.61 1901.05,2644.61 2246.05,2644.61 2311.05,2709.61 2371.05,2709.61 2411.05,2669.61 2411.05,2594.61 2486.05,2519.61 2631.05,2519.61 2721.05,2429.61 2721.05,2109.61 ARDUINO.11@2671.05,2059.61
PIN_LED_DATA: ARDUINO.3 MAX7219.1 | length 1787.6
  Top Layer w10: v1(3016.05,2944.61) 3066.05,2894.61 MAX7219.1@3201.05,2894.61
  Bottom Layer w10: ARDUINO.3@1871.05,2059.61 1941.05,2129.61 2121.05,2129.61 2321.05,2329.61 2321.05,2379.61 2761.05,2819.61 2761.05,2889.61 2816.05,2944.61 v1(3016.05,2944.61)
PIN_LED_LOAD: ARDUINO.6 MAX7219.12 | length 2586.4
  Top Layer w10: v1(3371.05,2499.61) 3371.05,2514.61 3481.05,2624.61 4031.05,2624.61 MAX7219.12@4301.05,2894.61
  Bottom Layer w10: ARDUINO.6@2171.05,2059.61 2216.05,2014.61 2996.05,2014.61 3251.05,2269.61 3251.05,2289.61 3251.05,2379.61 v1(3371.05,2499.61)
PIN_R1: ARDUINO.12 R8.2 | length 1713.3
  Top Layer w10: R8.2@1821.05,2884.61 1946.05,2884.61 2166.05,2664.61 2236.05,2664.61 2306.05,2734.61 2376.05,2734.61 2431.05,2679.61 2431.05,2604.61 2496.05,2539.61 2766.05,2539.61 2821.05,2484.61 2821.05,2109.61 ARDUINO.12@2771.05,2059.61
PIN_SENS_CE: ARDUINO.5 U5.15 U6.15 U7.15 U8.15 U9.15 | length 6605.3
  Top Layer w10: U5.15@1964.75,4095.91 2026.05,4034.61 2026.05,3772.31 2128.75,3669.61 2311.05,3669.61 2357.15,3623.51 U6.15@2358.45,3623.51 ; v1(1966.05,3874.61) 1876.05,3964.61 1661.05,3964.61 1576.05,3879.61 1576.05,2059.61 1621.05,2014.61 2026.05,2014.61 ARDUINO.5@2071.05,2059.61 ; U6.15@2358.41,3623.51 2359.95,3623.51 2406.05,3669.61 2406.05,3804.61 v1(2561.05,3959.61) ; v1(2826.05,3924.61) 2826.05,4091.15 U7.15@2830.85,4095.95 ; v1@3266.05,3879.61 3286.05,3859.61 v1@3286.05,3739.61 ; v1(3696.05,3909.61) U9.15@3697.05,4095.91
  Bottom Layer w10: v1(1966.05,3874.61) 2016.05,3824.61 2016.05,3759.61 2081.05,3694.61 2291.05,3694.61 2358.41,3627.25 U6.15@2358.41,3623.51 ; v1(2561.05,3959.61) 2791.05,3959.61 v1(2826.05,3924.61) 2871.05,3879.61 v1(3261.05,3879.61) ; v1(3286.05,3734.61) 3303.29,3717.37 U8.15@3303.29,3623.51 ; U8.15@3303.29,3623.51 3377.15,3549.61 3606.05,3549.61 3651.05,3594.61 3651.05,3864.61 v1(3696.05,3909.61)
PIN_SENS_DATA: ARDUINO.2 U5.9 | length 2553.3
  Top Layer w10: ARDUINO.2@1771.05,2059.61 1786.05,2074.61 v1(1786.05,2244.61) ; v1(2256.05,3074.61) 2261.05,3074.61 2261.05,3239.61 2291.05,3269.61 2381.05,3269.61 2406.05,3294.61 2406.05,3344.61 2506.05,3444.61 2506.05,3639.61 2631.05,3764.61 v1(2631.05,3849.61)
  Bottom Layer w10: v1(1786.05,2244.61) 1721.05,2309.61 1721.05,2539.61 v1(2256.05,3074.61) ; U5.9@2564.71,4095.95 2564.72,4068.27 2536.05,4039.61 2536.05,3944.61 v1(2631.05,3849.61)
PIN_SENS_LOAD: ARDUINO.4 U5.1 U6.1 U7.1 U8.1 U9.1 | length 5278.1
  Top Layer w10: v1(1841.05,3032.36) 1838.75,3032.31 1596.05,2789.61 1596.05,2319.61 1646.05,2269.61 1866.05,2269.61 1926.05,2209.61 1926.05,2104.61 ARDUINO.4@1971.05,2059.61 ; U5.1@1864.71,3795.95 2111.05,3549.61 2111.05,3389.61 2177.15,3323.51 U6.1@2258.41,3323.51 2236.05,3301.15 v1(2236.05,3099.61) ; U8.1@3203.29,3323.51 3414.39,3534.61 3511.05,3534.61 3556.05,3579.61 3556.05,3649.61 3597,3690.56 U9.1@3597,3795.95
  Bottom Layer w10: v1(1841.05,3032.36) 2148.81,3032.36 2206.05,3089.61 2216.05,3099.61 v1(2236.05,3099.61) ; U6.1@2258.45,3323.51 2258.45,3347.01 2306.05,3394.61 2656.05,3394.61 2819.45,3558.01 2819.45,3707.41 U7.1@2730.85,3795.95 2794.55,3859.61 3041.05,3859.61 3076.05,3824.61 3076.05,3749.61 3126.05,3699.61 3126.05,3399.61 3202.15,3323.51 U8.1@3203.29,3323.51
PIN_SPI_SCK: ARDUINO.19 MAX7219.13 U5.2 U6.2 U7.2 U8.2 U9.2 | length 6513.8
  Top Layer w10: U5.2@1964.71,3795.95 1964.71,3755.95 2351.05,3369.61 2358.41,3362.25 U6.2@2358.41,3323.51 ; v1(2271.05,2579.61) 2351.05,2579.61 ARDUINO.19@2571.05,2359.61 ; v1(3031.05,3204.61) 3096.05,3269.61 3261.05,3269.61 3303.29,3311.85 U8.2@3303.29,3323.51 ; v1(4031.05,3624.61) 4306.05,3624.61 4421.05,3739.61 4491.05,3739.61 4541.05,3689.61 4541.05,3244.61 4491.05,3194.61 MAX7219.13@4301.05,3194.61
  Bottom Layer w10: v1(2271.05,2579.61) 2271.05,2794.61 2451.05,2974.61 2521.05,2974.61 2561.05,3014.61 2566.05,3019.61 2566.05,3204.61 2501.05,3269.61 2406.05,3269.61 2358.41,3317.25 U6.2@2358.41,3323.51 ; U6.2@2358.45,3323.51 2409.55,3374.61 2981.05,3374.61 3031.05,3324.61 v1(3031.05,3204.61) ; U7.2@2830.85,3795.95 2882.19,3744.61 3016.05,3744.61 3101.05,3659.61 3101.05,3329.61 3156.05,3274.61 3266.05,3274.61 3303.29,3311.85 U8.2@3303.29,3323.51 3489.39,3509.61 3656.05,3509.61 3751.05,3604.61 ; U9.2@3697,3795.95 3697,3793.66 3751.05,3739.61 3751.05,3604.61 ; v1(4031.05,3624.61) 3991.05,3584.61 3881.05,3584.61 3771.05,3584.61 3751.05,3604.61
Q3_2: Q3.2 R8.1 | length 623.2
  Top Layer w10: R8.1@2221.05,2884.61 2321.05,2884.61 2496.05,2709.61 2591.05,2709.61 2621.05,2739.61 2621.05,2784.61 2601.05,2804.61 Q3.2@2536.05,2804.61
Q4_2: Q4.2 R9.1 | length 742.5
  Top Layer w10: R9.1@2221.05,2724.61 2296.05,2799.61 2366.05,2799.61 2486.05,2679.61 2676.05,2679.61 2801.05,2804.61 Q4.2@2831.05,2804.61
R1: CN_LR.1 Q3.3 | length 1094.1
  Top Layer w10: CN_LR.1@1856.05,3517.21 1856.05,3509.61 1911.05,3454.61 1941.05,3454.61 2191.05,3204.61 2191.05,3044.61 2481.05,2754.61 Q3.3@2536.05,2754.61
R_3: CN_BROOK_AS.7
R_X: CN_BROOK_AS.5 U_R_CTRL.3 | length 1069.6
  Top Layer w10: U_R_CTRL.3@2107.94,3177.36 2148.3,3177.36 2151.05,3174.61 2166.05,3159.61 v1(2166.05,3149.61)
  Bottom Layer w10: CN_BROOK_AS.5@1702.95,3817.21 1776.05,3744.11 1776.05,3309.61 1936.05,3149.61 v1(2166.05,3149.61)
R_X_CTRL_0: ARDUINO.26 U_R_CTRL.11 | length 1131.1
  Top Layer w10: U_R_CTRL.11@2344.16,3100.36 2410.3,3100.36 v1(2411.05,3099.61)
  Bottom Layer w10: ARDUINO.26@1871.05,2359.61 1866.05,2359.61 1796.05,2429.61 1796.05,2544.61 1806.05,2554.61 2351.05,3099.61 v1(2411.05,3099.61)
R_X_CTRL_1: ARDUINO.27 U_R_CTRL.10 | length 984.8
  Top Layer w10: v1(2289.04,3074.61) 2289.3,3074.36 U_R_CTRL.10@2344.16,3074.36
  Bottom Layer w10: ARDUINO.27@1771.05,2359.61 1771.05,2556.61 v1(2289.04,3074.61)
R_X_CTRL_2: ARDUINO.28 U_R_CTRL.9 | length 1555.2
  Top Layer w10: U_R_CTRL.9@2344.16,3049.36 2410.8,3049.36 v1(2411.05,3049.61)
  Bottom Layer w10: ARDUINO.28@1671.05,2359.61 1671.05,2314.61 1766.05,2219.61 1851.05,2219.61 1921.05,2289.61 1921.05,2384.61 1821.05,2484.61 1821.05,2529.61 2111.05,2819.61 2246.05,2819.61 2411.05,2984.61 v1(2411.05,3049.61)
S$8: 
S$10: 
S$12: 
S$21: 
S$23: 
S$51: 
S$53: 
S$61: 
S$93: 
S$97: 
S$99: 
S$101: 
U2_4: U2.4
U5_7: U5.7
U5_10: U5.10 U6.9 | length 1428.4
  Top Layer w10: v1(2906.05,3979.61) 2891.05,3964.61 2891.05,3694.61 2958.41,3627.24 U6.9@2958.41,3623.51
  Bottom Layer w10: U5.10@2464.75,4095.91 2464.75,4135.9 2366.05,4234.61 2366.05,4299.61 2406.05,4339.61 2521.05,4339.61 2571.05,4289.61 2571.05,4164.61 2641.05,4094.61 2641.05,4069.61 2731.05,3979.61 v1(2906.05,3979.61)
U6_7: U6.7
U6_10: U6.10 U7.9 | length 1043.1
  Top Layer w10: v1(3051.05,3569.61) 3181.05,3699.61 3181.05,3809.61 3201.05,3829.61 v1(3201.05,3954.61) ; v1(3261.05,3954.61) 3402.39,4095.95 U7.9@3430.85,4095.95
  Bottom Layer w10: U6.10@2858.41,3623.51 2858.41,3557.25 2911.05,3504.61 2986.05,3504.61 v1(3051.05,3569.61) ; v1(3201.05,3954.61) v1(3261.05,3954.61)
U7_7: U7.7
U7_10: U7.10 U8.9 | length 985.9
  Top Layer w10: U7.10@3330.85,4095.95 3389.52,4154.61 3441.05,4154.61 3471.05,4124.61 v1(3471.05,4004.61)
  Bottom Layer w10: v1(3471.05,4004.61) 3471.05,3999.61 3691.05,3999.61 3746.05,3944.61 3746.05,3780.75 U8.9@3903.29,3623.51
U8_7: U8.7
U8_10: U8.10 U9.9 | length 862.4
  Top Layer w10: U8.10@3803.29,3623.51 3889.39,3709.61 4206.05,3709.61 4251.05,3754.61 4251.05,4044.61 4297,4090.56 U9.9@4297,4095.95
U9_7: U9.7
U9_10: U9.10
USB_RAW: C1.1 CN_PWR.1 U2.3 U4.1 | length 933.1
  Top Layer w10: U2.3@4071.05,2320.16 4176.6,2214.61 CN_PWR.1@4299.97,2214.61 ; U4.1@4181.05,1899.61 4316.05,2034.61 CN_PWR.1@4316.05,2214.61 4306.05,2224.61 C1.1@4306.05,2500.01
VCC: ARDUINO.7 ARDUINO.20 ARDUINO.21 C2.1 C3.2 C7.2 C8.1 MAX7219.19 R3.2 R4.1 R5.2 U4.3 U5.16 U6.16 U7.16 U8.16 U9.16 U_L_CTRL.16 U_R_CTRL.16 | length 11927
  Top Layer w10: U5.16@1864.75,4095.91 2006.05,3954.61 2006.05,3764.61 2147.15,3623.51 U6.16@2258.45,3623.51 ; U_L_CTRL.16@1919.44,3228.36 2014.8,3228.36 v1(2016.05,3229.61) ; ARDUINO.7@2271.05,2059.61 2391.05,1939.61 R5.2@2526.05,1939.61 ; v1(2291.05,3229.61) 2342.91,3229.61 U_R_CTRL.16@2344.16,3228.36 ; ARDUINO.21@2371.05,2359.61 ARDUINO.20@2471.05,2359.61 ; U7.16@2730.85,4095.95 v1(2731.05,3924.61) ; R3.2@2891.05,2624.61 3031.05,2624.61 3221.05,2434.61 3506.05,2434.61 3540.55,2469.11 C3.2@3540.58,2499.61 ; v1(3126.05,4029.61) 3126.05,3859.61 3081.05,3814.61 3081.05,3759.61 3011.05,3689.61 3011.05,3559.61 3066.05,3504.61 v1(3206.05,3504.61) 3206.05,3620.75 U8.16@3203.29,3623.51 ; v1(3311.05,3554.61) 3426.05,3554.61 3446.05,3574.61 3446.05,3634.61 3551.05,3739.61 3551.05,3830.61 ; v1(3346.05,3414.61) 3346.05,3284.61 3316.05,3254.61 3281.05,3254.61 3251.05,3224.61 3251.05,2859.61 3291.05,2819.61 3411.05,2819.61 3451.05,2859.61 3451.05,2944.61 MAX7219.19@3701.05,3194.61 ; C3.2@3540.58,2499.61 3540.98,2500.01 C2.1@3686.05,2500.01 3790.65,2604.61 4001.05,2604.61 4099.35,2506.31 C8.1@4099.35,2500.01 ; 3551.05,3829.61 3551.05,3830.61 ; U9.16@3597.05,4095.91 3551.05,4050.01 3551.05,3830.61 ; U4.3@3981.05,1899.61 3981.05,2381.71 C8.1@4099.35,2500.01 ; R4.1@4456.05,2849.61 4365.11,2758.66 C7.2@4365.11,2739.61 4365.11,2673.66 4306.05,2614.61 4213.95,2614.61 C8.1@4099.35,2500.01
  Bottom Layer w10: U6.16@2258.41,3623.51 2016.05,3381.15 v1(2016.05,3229.61) v1(2291.05,3229.61) ; U6.16@2258.45,3623.51 2357.35,3524.61 2731.05,3524.61 2801.05,3594.61 2801.05,3639.61 2671.05,3769.61 2671.05,3864.61 v1(2731.05,3924.61) ; ARDUINO.7@2271.05,2059.61 2271.05,2159.61 ARDUINO.20@2471.05,2359.61 2736.05,2624.61 R3.2@2891.05,2624.61 ; U7.16@2730.85,4095.95 2730.85,4064.81 2766.05,4029.61 v1(3126.05,4029.61) ; U8.16@3203.29,3623.51 3272.19,3554.61 v1(3311.05,3554.61) ; v1(3206.05,3504.61) 3296.05,3414.61 v1@3341.05,3414.61 ; MAX7219.19@3701.05,3194.61 3606.05,3099.61 3416.05,3099.61 3351.05,3034.61 3351.05,2839.61 3421.05,2769.61 3921.05,2769.61 4099.35,2591.31 C8.1@4099.35,2500.01
VDD: C4.1 CN_SENS_PWR.1 U2.2 | length 3016.3
  Top Layer w10: v1(2981.05,3714.61) 2981.05,3824.61 3001.05,3844.61 3036.05,3844.61 3071.05,3879.61 3071.05,4134.61 3011.05,4194.61 3011.05,4241.1 CN_SENS_PWR.1@3080.86,4310.91 ; v1(4011.05,2229.61) U2.2@4071.05,2229.61
  Bottom Layer w10: v1(2981.05,3714.61) 3076.05,3619.61 3076.05,2749.61 3221.05,2604.61 3796.05,2604.61 3892.75,2507.91 C4.1@3892.75,2500.01 4011.05,2381.71 v1(4011.05,2229.61)
pads on no net: PJ-393-7A.

## Polygon pours and split planes (outlines as drawn)
PGND on Bottom Layer (solid): 1500,4659.41 4649.61,4659.41 4649.61,1509.8 1500,1509.8
PGND on Top Layer (solid): 1505,4659.41 4654.61,4659.41 4654.61,1509.8 1505,1509.8